# Altium PCB Access_System_Bmduino_V1.1.PcbDoc
Units mm, origin at the board's own origin, x right, y up, seen from the top; angles counter-clockwise.
Board outline 37.82 x 48.46 mm, 2 copper layers (Top Layer, Bottom Layer); 34 components, 20 nets, 152 pads, 24 vias.
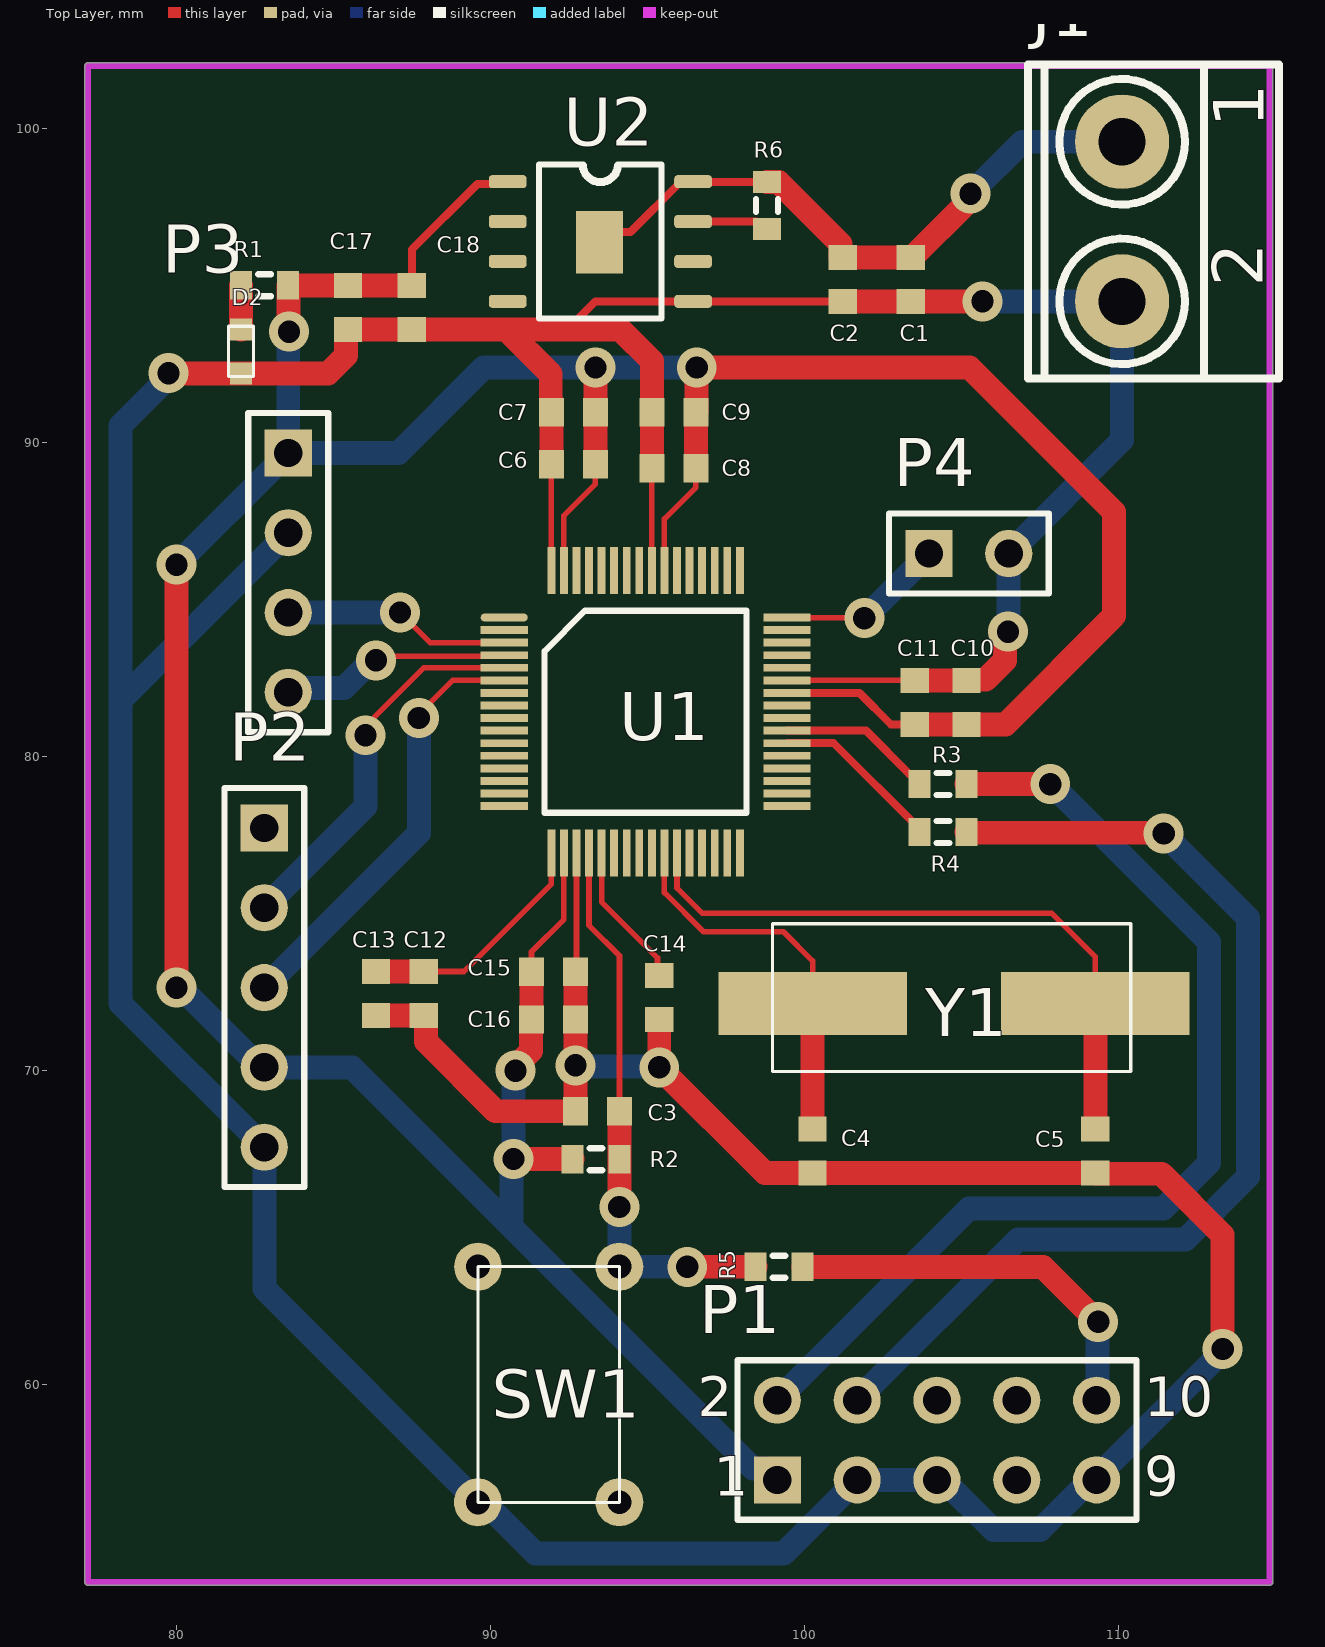
[diagram p0: Top Layer view]
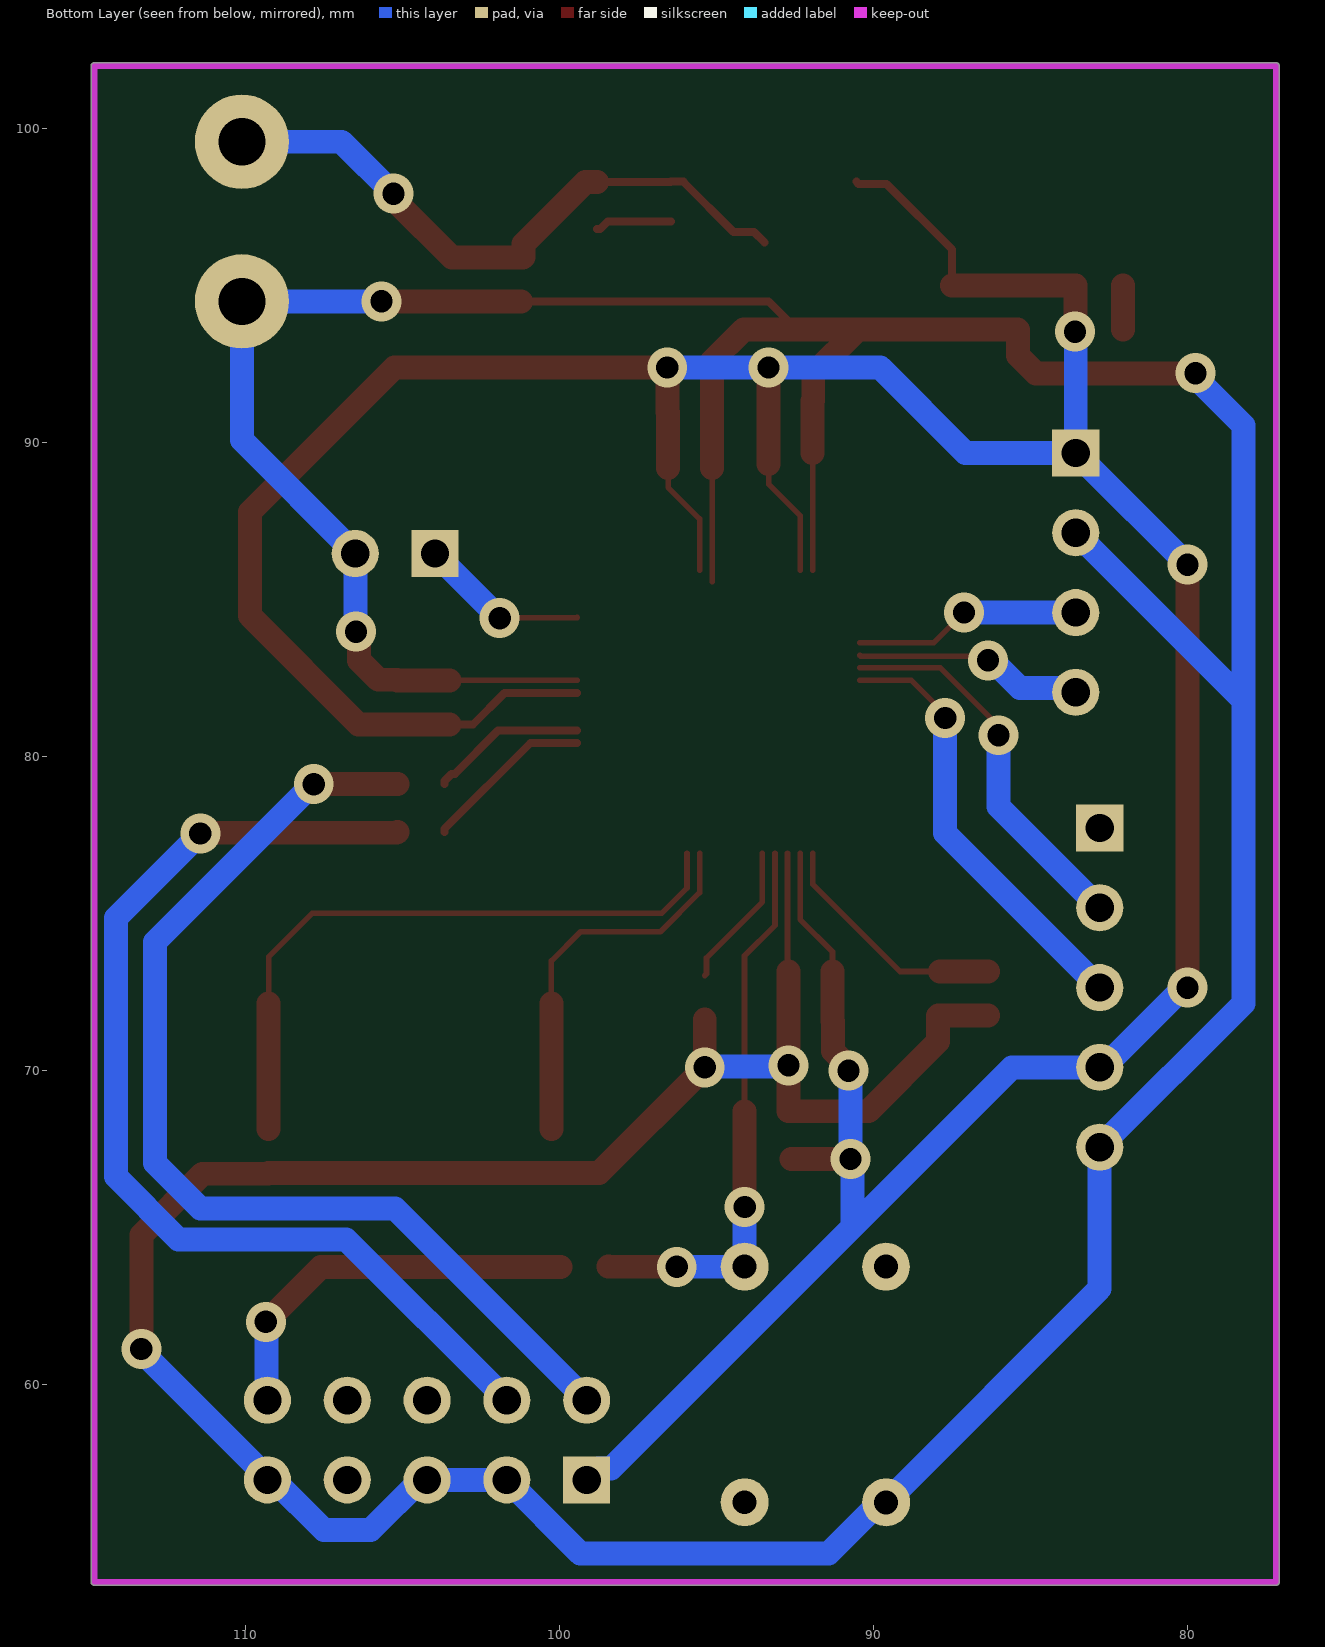
[diagram p1: Bottom Layer view, seen from below]

## Layer stack, top to bottom
Top Solder: solder mask 0.0102, Solder Resist, Dk 3.5
Top Layer: signal copper 0.0356
Dielectric 1: dielectric 0.32, FR-4, Dk 4.8
Bottom Layer: signal copper 0.0356
Bottom Solder: solder mask 0.0102, Solder Resist, Dk 3.5

## Board outline
77.09,53.721 77.09,101.981 cw(c77.191,101.981) 77.191,102.081 114.808,102.081 cw(c114.808,101.981) 114.908,101.981 114.908,53.721 cw(c114.808,53.721) 114.808,53.621 77.191,53.621 cw(c77.191,53.721)

## Design rules (kind name [scope] priority, off if disabled: settings)
Clearance [All] p1: gap=0.102 ignorepadtopadclearanceinfootprint=FALSE except(0: Arc-Hole Track-Hole SMDPad-Hole THPad-Hole Via-Hole Fill-Hole Poly-Hole Region-Hole Text-Hole)
PolygonConnect [All] p1: connectstyle=Relief reliefconductorwidth=0.254 reliefentries=4 polygonreliefangle="90 Angle" airgapwidth=0.254
RoutingVias [All] p1: holewidth=0.711 width=1.27 viastyle="Through Hole" minholewidth=0.711 minwidth=1.27 maxholewidth=0.711 maxwidth=1.27
SolderMaskExpansion [All] p1: expansion=0.102 istentingtop=FALSE
Width [All] p1: maxlimit=0.762 minlimit=0.178 preferedwidth=0.254 minimp=50.000000 maximp=50.000000 favimp=50.000000
30 further rules are at their usual default settings.

## Components (designator, comment, footprint, x,y, rotation, side; value= is the part's Value field where it differs from the comment)
C1 "Cap Semi" 1608[0603] 103.378,95.185 r90 top value=0.1uF
C2 "Cap Semi" 1608[0603] 101.219,95.185 r90 top value=10uF
C3 "Cap Semi" 1608[0603] 93.41,68.707 r0 top value=0.01uF
C4 "Cap Semi" 1608[0603] 100.258,67.437 r270 top value=12pF
C5 "Cap Semi" 1608[0603] 109.258,67.437 r90 top value=12pF
C6 "Cap Semi" 1608[0603] 92.641,89.306 r180 top value=2.2uF
C7 "Cap Semi" 1608[0603] 92.641,90.957 r0 top value=0.1uF
C8 "Cap Semi" 1608[0603] 95.841,89.179 r180 top value=2.2uF
C9 "Cap Semi" 1608[0603] 95.841,90.957 r0 top value=0.1uF
C10 "Cap Semi" 1608[0603] 105.156,81.723 r90 top value=2.2uF
C11 "Cap Semi" 1608[0603] 103.505,81.723 r270 top value=0.1uF
C12 "Cap Semi" 1608[0603] 87.884,72.455 r270 top value=2.2uF
C13 "Cap Semi" 1608[0603] 86.36,72.455 r90 top value=0.1uF
C14 "Cap Semi" 1608[0603] 95.377,72.328 r90 top value=0.1uF
C15 "Cap Semi" 1608[0603] 92.01,73.152 r0 top value=2.2uF
C16 "Cap Semi" 1608[0603] 92.01,71.628 r180 top value=0.1uF
C17 "Cap Semi" 1608[0603] 85.471,94.296 r90 top value=0.1uF
C18 "Cap Semi" 1608[0603] 87.5,94.296 r90 top value=10uF
D2 "green_light" LED_Green 82.066,93.596 r270 top
J1 "Terminal_Block" "terminal block" 103.693,94.983 r0 top
P1 "SW-DP" HDR2X5 99.136,56.972 r0 top
P2 "Wi-Fi_USART1" HDR1X5 82.804,77.724 r270 top
P3 "Barcode_USART0" HDR1X4 83.566,89.662 r270 top
P4 "State_LED" HDR1X2 103.962,86.462 r0 top
R1 "Res3" J1-0603 82.816,94.996 r180 top value=100
R2 "Res3" J1-0603 93.36,67.183 r0 top value=100
R3 "Res3" J1-0603 104.406,79.121 r180 top value=100
R4 "Res3" J1-0603 104.406,77.597 r180 top value=100
R5 "Res3" J1-0603 99.187,63.761 r180 top value=100
R6 "Res3" J1-0603 98.806,97.536 r270 top value=100
SW1 "BUTTON_DIP_4PIN" Push_Button 89.607,63.761 r270 top
U1 "HT32F52367" HT32H52367 90.441,84.423 r0 top
U2 "HT7333-7" HT7333 91.551,98.843 r270 top
Y1 "SMD_8MHz" Quartz-Crystal-8MHz 100.508,72.136 r0 top

## Footprints (in the part's own frame and the unit in brackets; to place one, negate y for a bottom-side part, rotate by r counter-clockwise, add the part's x,y. Pads: shape width x height; smd on the part's side, far side on the other; paste and mask are expansions set on the pad)
1608[0603] [mm] "Chip Capacitor, Body 1.6x0.8mm, IPC High Density"
  rect 0.8x0.9 smd: 1(-0.7,0) 2(0.7,0)
  body extent -0.87,-0.48 0.87,0.48, height 1.3
HDR1X2 [mm] "Connector; Header; 2 Position"
  rect 1.5x1.5 hole 0.9: 1(0,0)
  round 1.5 hole 0.9: 2(2.54,0)
  silkscreen extent -1.27,-1.27 3.81,1.27
HDR1X4 [mm] "Connector; Header; 4 Position"
  rect 1.5x1.5 hole 0.9: 1(0,0)
  round 1.5 hole 0.9: 2(2.54,0) 3(5.08,0) 4(7.62,0)
  silkscreen extent -1.27,-1.27 8.89,1.27
HDR1X5 [mm] "Connector; Header; 5 Position"
  rect 1.5x1.5 hole 0.9: 1(0,0)
  round 1.5 hole 0.9: 2(2.54,0) 3(5.08,0) 4(7.62,0) 5(10.16,0)
  silkscreen extent -1.27,-1.27 11.43,1.27
HDR2X5 [mm] "Connector; Header; 5x2 Position"
  rect 1.5x1.5 hole 0.9: 1(0,0)
  round 1.5 hole 0.9: 2(0,2.54) 3(2.54,0) 4(2.54,2.54) 5(5.08,0) 6(5.08,2.54) 7(7.62,0) 8(7.62,2.54) 9(10.16,0) 10(10.16,2.54)
  silkscreen extent -1.27,-1.27 11.43,3.81
HT32H52367 [mm] "HT32H52367"
  oval 1.5x0.25 smd: 1(0,0)
  rect 1.5x0.25 smd: 2(0,-0.4) 3(0,-0.8) 4(0,-1.2) 5(0,-1.6) 6(0,-2) 7(0,-2.4) 8(0,-2.8) 9(0,-3.2) 10(0,-3.6) 11(0,-4) 12(0,-4.4) 13(0,-4.8) 14(0,-5.2) 15(0,-5.6) 16(0,-6) 33(9,-6) 34(9,-5.6) 35(9,-5.2) 36(9,-4.8) 37(9,-4.4) 38(9,-4) 39(9,-3.6) 40(9,-3.2) 41(9,-2.8) 42(9,-2.4) 43(9,-2) 44(9,-1.6) 45(9,-1.2) 46(9,-0.8) 47(9,-0.4) 48(9,0)
  rect 0.25x1.5 smd: 17(1.5,-7.5) 18(1.9,-7.5) 19(2.3,-7.5) 20(2.7,-7.5) 21(3.1,-7.5) 22(3.5,-7.5) 23(3.9,-7.5) 24(4.3,-7.5) 25(4.7,-7.5) 26(5.1,-7.5) 27(5.5,-7.5) 28(5.9,-7.5) 29(6.3,-7.5) 30(6.7,-7.5) 31(7.1,-7.5) 32(7.5,-7.5) 49(7.5,1.5) 50(7.1,1.5) 51(6.7,1.5) 52(6.3,1.5) 53(5.9,1.5) 54(5.5,1.5) 55(5.1,1.5) 56(4.7,1.5) 57(4.3,1.5) 58(3.9,1.5) 59(3.5,1.5) 60(3.1,1.5) 61(2.7,1.5) 62(2.3,1.5) 63(1.9,1.5) 64(1.5,1.5)
  silkscreen extent 1.28,-6.21 7.71,0.22
HT7333 [mm] "HT7333-7"
  rrect50% 0.41x1.2 smd: 1(0.545,-1) 2(1.815,-1) 3(3.085,-1) 4(4.355,-1) 5(4.355,4.902) 6(3.085,4.902) 7(1.815,4.902) 8(0.545,4.902)
  rect 2x1.5 smd: 9(2.475,1.925)
  silkscreen extent 0,0 4.9,3.9
J1-0603 [mm] "Chip Resistor, Body 1.6x0.8mm, IPC High Density"
  rect 0.7x0.9 smd: 1(-0.75,0) 2(0.75,0)
  silkscreen extent -0.2,-0.35 0.2,0.35, body extent -0.85,-0.48 0.85,0.48, height 0.9
LED_Green [mm] "LED_0603"
  rect 0.7x0.7 smd: 1(0,0) 2(1.4,0)
  silkscreen extent -0.1,-0.4 1.5,0.4
Push_Button [mil] "6*6"
  round 60 hole 30: 1(0,177.17) 2(0,0) 3(295.28,177.17) 4(295.37,-0.17)
  silkscreen extent 0,0 295,177
Quartz-Crystal-8MHz [mm] "Quartz-Crystal-8MHz"
  rect 6x2 smd: 1(-0.25,0) 2(8.75,0)
  silkscreen extent -1.52,-2.16 9.88,2.54
"terminal block" [mm]
  round 3 hole 1.5 paste+0 mask+0.051: 1(6.416,4.585) 2(6.416,-0.495)
  silkscreen extent 3.42,-2.96 11.42,7.04

## Part data
C1 C2 C3 C4 C5 C6 C7 C8 C9 C10 C11 C12 C13 C14 C15 C16 C17 C18: "Capacitor (Semiconductor SIM Model)", LatestRevisionDate=29-May-2009, LatestRevisionNote="IPC-7351 Footprint Added.", PackageDescription="Chip Capacitor", PackageReference=C1206, Published=8-Jun-2000, Publisher="Altium Limited"
D2: library part LED_Green
J1: library part "Terminal Block"
P1: library part "Header 5X2", "Header, 5-Pin, Dual row", LatestRevisionDate=17-Jul-2002, LatestRevisionNote="Re-released for DXP Platform.", Publisher="Altium Limited"
P2: library part "Header 5", "Header, 5-Pin", LatestRevisionDate=17-Jul-2002, LatestRevisionNote="Re-released for DXP Platform.", Publisher="Altium Limited"
P3: library part "Header 4", "Header, 4-Pin", LatestRevisionDate=17-Jul-2002, LatestRevisionNote="Re-released for DXP Platform.", Publisher="Altium Limited"
P4: library part "Header 2", "Header, 2-Pin", LatestRevisionDate=17-Jul-2002, LatestRevisionNote="Re-released for DXP Platform.", Publisher="Altium Limited"
R1 R2 R3 R4 R5 R6: "Resistor", LatestRevisionDate=29-May-2009, LatestRevisionNote="IPC-7351 Footprint Added.", PackageDescription="Chip Resistor", PackageReference=J1-0603, Published=8-Jun-2000, Publisher="Altium Limited"
SW1: library part Push_Button
U2: library part HT7333
Y1: library part Quartz_Crystal_8MHz

## Via types
v1: diameter 1.27, hole 0.711, Top Layer to Bottom Layer, 24 vias

## Nets (pads, with @x,y where several pads share a name; then routed paths per layer and width w, separated by ;. In a path a pad name is that pad's centre, name@x,y a point inside that pad or via, vN(x,y) a via of type N, cw(c..) or ccw(c..) an arc to the next point about the centre after c; other vN are vias at no path point)
3.3V: C6.1 C7.2 C8.1 C9.2 C10.1 C11.2 C15.1 C16.2 C17.2 C18.2 P1.1 P2.4 P3.1 R1.1 R2.1 U1.18 U1.42 U1.55 U1.63 U2.1 | length 131.7
  Top Layer w0.178: C15.1 91.31,73.784 92.341,74.815 U1.18 ; U1.63 92.341,87.667 93.341,88.667 C6.1 ; U1.55 95.541,87.565 96.541,88.565 C8.1
  Top Layer w0.254: C18.2 87.5,96.136 89.592,98.228 90.481,98.228 U2.1 ; U1.42 101.746,82.023 102.746,81.023 C11.2
  Top Layer w0.762: v1(80.01,72.644) v1(80.01,86.106) ; v1(83.591,93.523) 83.579,93.535 83.579,94.983 R1.1 C17.2 C18.2 ; v1(90.737,67.187) 92.605,67.187 R2.1 ; v1(90.8,70) 90.8,70.137 91.291,70.628 91.291,71.559 91.31,71.578 C15.1 ; C6.1 C7.2 93.343,90.959 93.343,92.378 v1(93.345,92.38) ; C8.1 C9.2 96.556,90.972 96.556,92.365 v1(96.571,92.38) 105.258,92.38 109.855,87.782 109.855,84.48 106.398,81.023 C10.1 C11.2
  Bottom Layer w0.762: v1(80.01,72.644) 80.137,72.644 82.677,70.104 P2.4 85.598,70.104 90.675,65.027 ; v1(80.01,86.106) 83.312,89.408 83.312,89.662 P3.1 ; v1(83.591,93.523) 83.566,93.497 P3.1 ; v1(90.8,70) 90.737,69.938 v1(90.737,67.187) 90.675,67.125 90.675,65.027 ; v1(96.571,92.38) v1(93.345,92.38) 89.789,92.38 87.071,89.662 P3.1 ; P1.1 98.767,57.341 98.361,57.341 90.675,65.027
5V: C1.2 C2.2 J1.1 R6.1 U2.8 U2.9 | length 20.3
  Top Layer w0.254: U2.9 93.806,96.698 94.458,96.698 96.058,98.298 U2.8 96.459,98.292 98.8,98.292 R6.1
  Top Layer w0.762: R6.1 99.174,98.286 101.15,96.31 101.15,95.904 101.169,95.885 103.428,95.885 105.186,97.643 105.186,97.82 v1(105.283,97.917)
  Bottom Layer w0.762: v1(105.283,97.917) 106.934,99.568 J1.1
CLDO: C12.1 C13.2 U1.17 | length 7.7
  Top Layer w0.178: C12.1 89.157,73.155 91.941,75.939 U1.17
  Top Layer w0.762: C13.2 C12.1
GND: C1.1 C2.1 C3.1 C4.2 C5.1 C6.2 C7.1 C8.2 C9.1 C10.2 C11.1 C12.2 C13.1 C14.1 C15.2 C16.1 C17.1 C18.1 D2.2 J1.2 P1.3 P1.5 P1.9 P2.5 P3.2 P4.2 SW1.4 U1.19 U1.43 U1.56 U1.64 U2.5 | length 192.1
  Top Layer w0.178: U1.64 C6.2@91.941,89.662 ; C15.2 92.741,73.183 U1.19 ; U1.56@95.141,85.567 U1.56 C8.2 ; U1.43 C11.1
  Top Layer w0.254: 92.453,93.596 93.345,94.488 U2.5 101.216,94.488 C2.1
  Top Layer w0.762: v1(79.756,92.202) 79.762,92.196 D2.2 84.83,92.196 85.402,92.768 85.402,93.577 85.421,93.596 C17.1 C18.1 ; C13.1 C12.2 87.934,71.755 87.953,71.736 87.953,70.924 90.17,68.707 C3.1 v1(92.71,70.168) C16.1 C15.2 ; C18.1@87.55,93.596 90.503,93.596 ; C6.2@91.941,89.662 C7.1 91.941,91.313 91.922,91.332 91.922,92.177 90.503,93.596 ; C8.2 C9.1 95.141,92.59 94.135,93.596 92.453,93.596 90.503,93.596 ; C14.1 v1(95.377,70.104) 98.744,66.737 C4.2 C5.1 109.277,66.718 111.361,66.718 113.309,64.77 v1(113.309,61.138) ; C2.1 C1.1 103.38,94.487 105.663,94.487 v1(105.664,94.488) ; C11.1 C10.2 105.175,82.442 105.759,82.442 106.38,83.062 106.38,83.875 v1(106.477,83.972)
  Bottom Layer w0.762: v1(79.756,92.202) 79.756,92.065 78.232,90.541 78.232,81.788 ; P3.2@83.702,87.258 78.232,81.788 ; v1(92.71,70.168) 92.742,70.136 95.345,70.136 v1(95.377,70.104) ; v1(105.664,94.488) J1.2 110.109,90.068 P4.2 106.489,86.449 106.489,83.985 v1(106.477,83.972) ; v1(113.309,61.138) 113.309,61.062 109.296,57.048 P1.9 109.096,56.972 107.496,55.372 106.016,55.372 104.416,56.972 P1.5 P1.3 99.339,54.635 91.432,54.635 89.809,56.259 SW1.4 82.804,63.057 P2.5 78.232,72.136 78.232,81.788
GPIO_LED_PD3: P4.1 U1.48 | length 5.4
  Top Layer w0.178: U1.48 99.45,84.414 101.895,84.414 v1(101.905,84.404)
  Bottom Layer w0.762: v1(101.905,84.404) P4.1
NetD2_1: D2.1 R1.2 | length 1.4
  Top Layer w0.762: D2.1 R1.2
NetP1_2: P1.2 R3.1 | length 33.7
  Top Layer w0.762: R3.1 v1(107.823,79.121)
  Bottom Layer w0.762: P1.2 105.232,65.608 111.43,65.608 112.878,67.056 112.878,74.092 107.848,79.121 v1(107.823,79.121)
NetP1_4: P1.4 R4.1 | length 33.7
  Top Layer w0.762: R4.1 105.181,77.572 111.404,77.572 v1(111.43,77.546)
  Bottom Layer w0.762: P1.4 106.789,64.625 112.123,64.625 114.122,66.624 114.122,74.854 v1(111.43,77.546)
NetP1_10: P1.10 R5.1 | length 12.9
  Top Layer w0.762: R5.1@99.968,63.754 107.594,63.754 v1(109.347,62.001)
  Bottom Layer w0.762: P1.10@109.296,59.24 109.321,59.266 109.321,61.976 v1(109.347,62.001)
nRST: C3.2 R2.2 R5.2 SW1.1 U1.20 | length 17.9
  Top Layer w0.178: U1.20 93.141,74.626 94.11,73.657 C3.2
  Top Layer w0.762: v1(94.107,65.659) 94.108,65.66 94.108,67.182 R2.2 C3.2 ; v1(96.266,63.754) 96.27,63.758 98.434,63.758 R5.2
  Bottom Layer w0.762: v1(94.107,65.659) SW1.1 94.111,63.758 96.262,63.758 v1(96.266,63.754)
SWCLK_PA12: R4.2 U1.38 | length 5.4
  Top Layer w0.254: U1.38 100.93,80.423 103.656,77.697 R4.2
SWDIO_PA13: R3.2 U1.39 | length 5
  Top Layer w0.254: U1.39 101.954,80.823 103.333,79.444 103.433,79.444 103.656,79.221 R3.2
USART0_Rx_PA2: P3.3 U1.3 | length 7.3
  Top Layer w0.178: v1(87.122,84.582) 88.081,83.623 U1.3
  Bottom Layer w0.762: P3.3 v1(87.122,84.582)
USART0_Tx_PA3: P3.4 U1.4 | length 7.3
  Top Layer w0.178: v1(86.36,83.058) 86.489,83.187 90.405,83.187 U1.4
  Bottom Layer w0.762: P3.4@83.617,82.042 83.758,82.183 85.348,82.183 86.223,83.058 v1(86.36,83.058)
USART1_Rx_PA4: P2.2 U1.5 | length 12.3
  Top Layer w0.178: v1(86.025,80.675) 86.025,80.971 87.877,82.823 U1.5
  Bottom Layer w0.762: P2.2@82.78,75.16 86.025,78.405 v1(86.025,80.675)
USART1_Tx_PA5: P2.3 U1.6 | length 13.9
  Top Layer w0.178: v1(87.725,81.225) 87.725,81.35 88.798,82.423 U1.6
  Bottom Layer w0.762: P2.3 87.725,77.565 v1(87.725,81.225)
VBAT: C14.2 U1.21 | length 4.7
  Top Layer w0.178: U1.21 93.541,75.369 95.319,73.591 95.319,73.086 C14.2
VCE: R6.2 U2.7 | length 2.5
  Top Layer w0.254: U2.7 98.464,97.028 98.706,96.786 R6.2
XTALIN_PB13: C4.1 U1.26 Y1.1 | length 12.2
  Top Layer w0.178: U1.26 95.541,75.666 96.785,74.422 99.331,74.422 100.258,73.495 Y1.1
  Top Layer w0.762: C4.1 Y1.1
XTALOUT_PB14: C5.2 U1.27 Y1.2 | length 20.8
  Top Layer w0.178: U1.27 95.941,75.814 96.749,75.006 107.874,75.006 109.258,73.622 Y1.2
  Top Layer w0.762: C5.2 Y1.2
pads on no net: P1.6 P1.7 P1.8 P2.1 SW1.2 SW1.3 U1.1 U1.2 U1.7 U1.8 U1.9 U1.10 U1.11 U1.12 U1.13 U1.14 U1.15 U1.16 U1.22 U1.23 U1.24 U1.25 U1.28 U1.29 U1.30 U1.31 U1.32 U1.33 U1.34 U1.35 U1.36 U1.37 U1.40 U1.41 U1.44 U1.45 U1.46 U1.47 U1.49 U1.50 U1.51 U1.52 U1.53 U1.54 U1.57 U1.58 U1.59 U1.60 U1.61 U1.62 U2.2 U2.3 U2.4 U2.6

## Keep-outs
Keep-Out Layer:
  lines w0.2: 77.191,53.721 77.191,101.981 114.808,101.981 114.808,53.721 77.191,53.721

## Silkscreen, mask and mechanical layers (free items; w line width, h text height)
Mechanical 13:
  lines w0.254: 74.93,55.118 75.438,53.594 ; 74.93,100.584 75.438,102.108 ; 75.184,53.594 75.692,53.594 ; 75.184,102.108 75.692,102.108 ; 75.438,69.954 75.438,53.594 ; 75.438,85.748 75.438,102.108 ; 75.946,55.118 75.438,53.594 ; 75.946,100.584 75.438,102.108 ; 77.216,102.616 77.216,103.124 ; 78.74,102.362 77.216,102.87 ; 78.74,103.378 77.216,102.87 ; 87.988,102.87 77.216,102.87 ; 104.036,102.87 114.808,102.87 ; 113.284,102.362 114.808,102.87 ; 113.284,103.378 114.808,102.87 ; 114.808,102.616 114.808,103.124
  text "37.592 (mm)" at 88.242,101.956 h1.52
  text "48.514 (mm)" at 76.352,70.208 h1.52 r90

## Text inside footprints (layer, text, board x,y; h text height)
J1: Top Overlay "1" at 114.617,100.018 h1.6 r90; Top Overlay "2" at 114.584,94.948 h1.6 r90
P1: Top Overlay "10" at 110.82,59.004 h1.27; Top Overlay "9" at 110.82,56.464 h1.27; Top Overlay "1" at 97.104,56.464 h1.27; Top Overlay "2" at 96.596,59.004 h1.27